# Altium PCB PCB_STM32F0_BUCK_2021-07-07_2021-12-07.pcbdoc
Units mil, origin at the board's own origin, x right, y up, seen from the top; angles counter-clockwise.
Board outline 5374.6 x 4291.85 mil, 2 copper layers (Top Layer, Bottom Layer); 90 components, 52 nets, 323 pads, 491 vias.
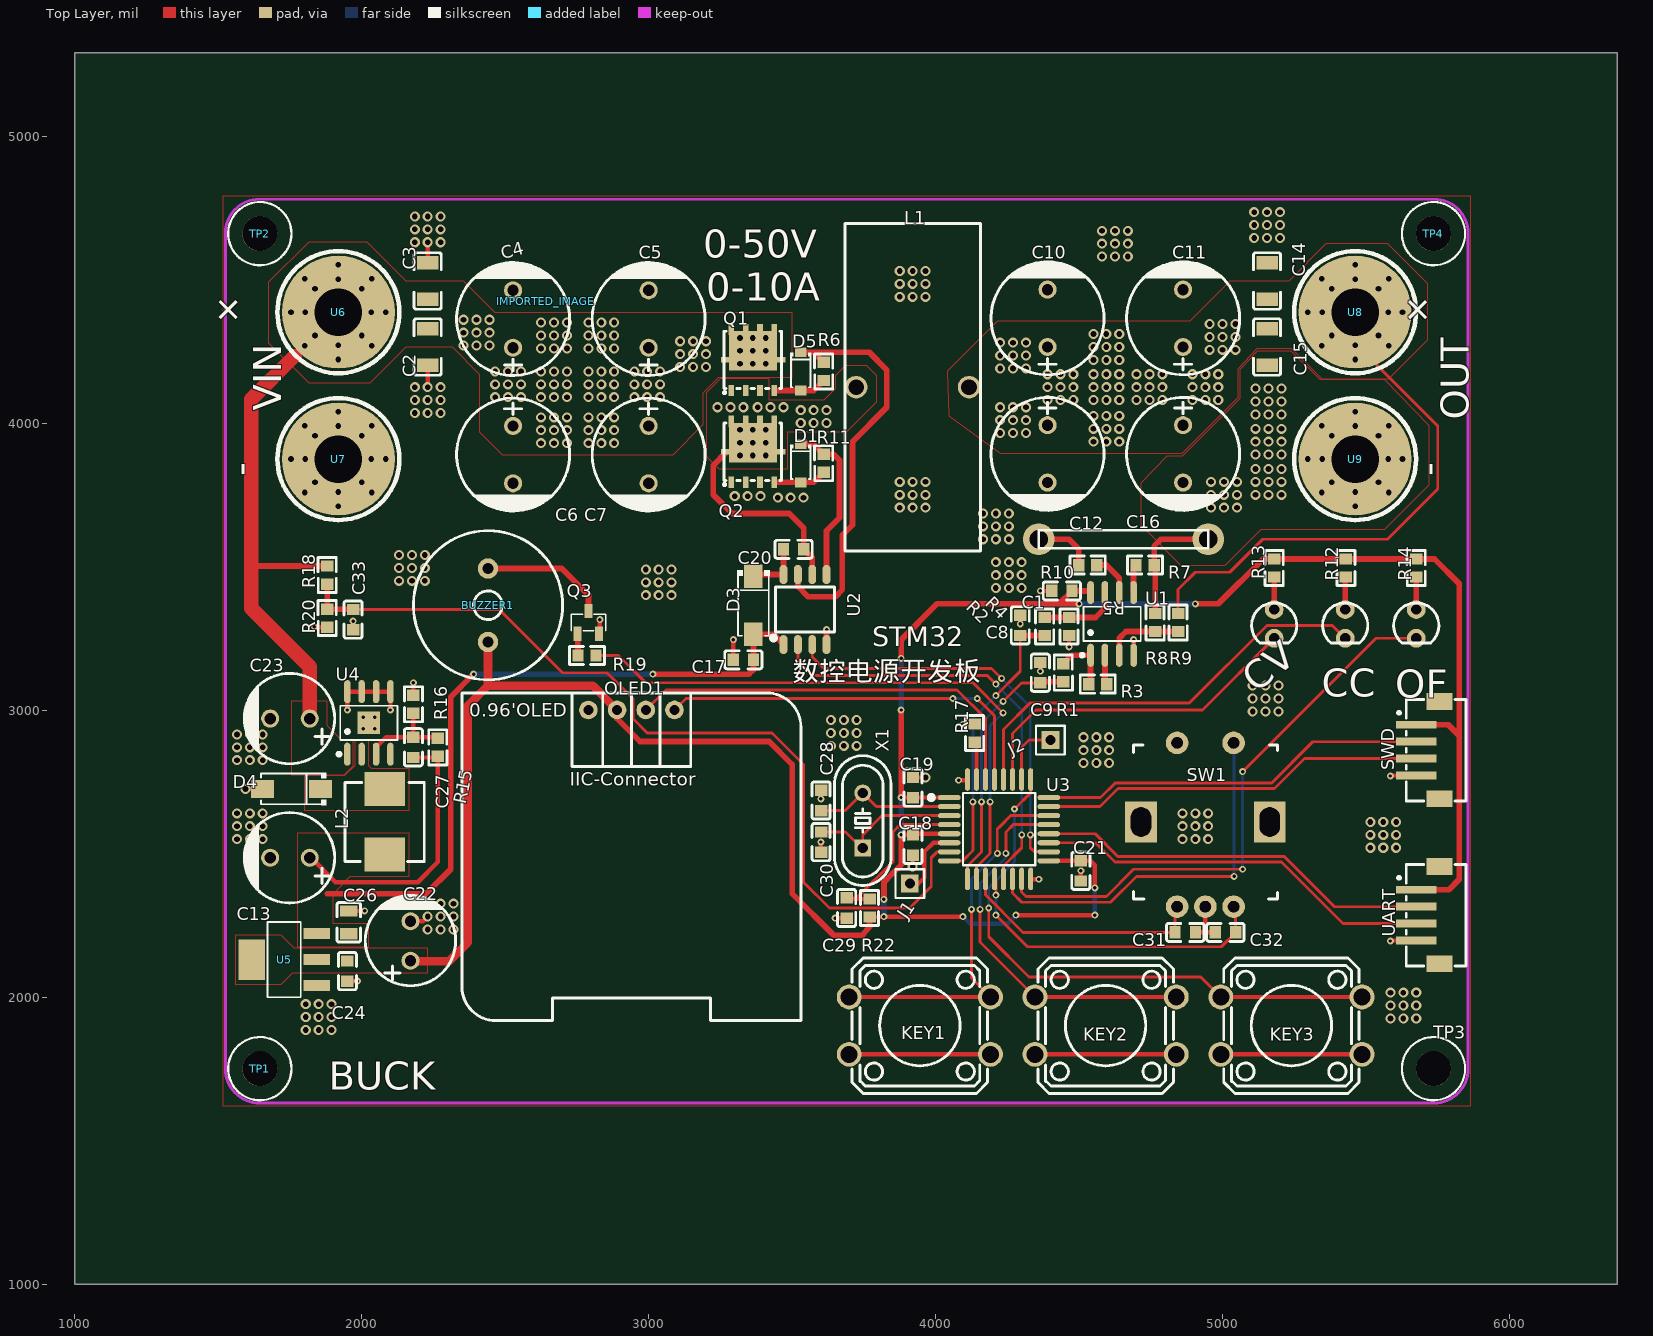
[diagram p0: Top Layer view]
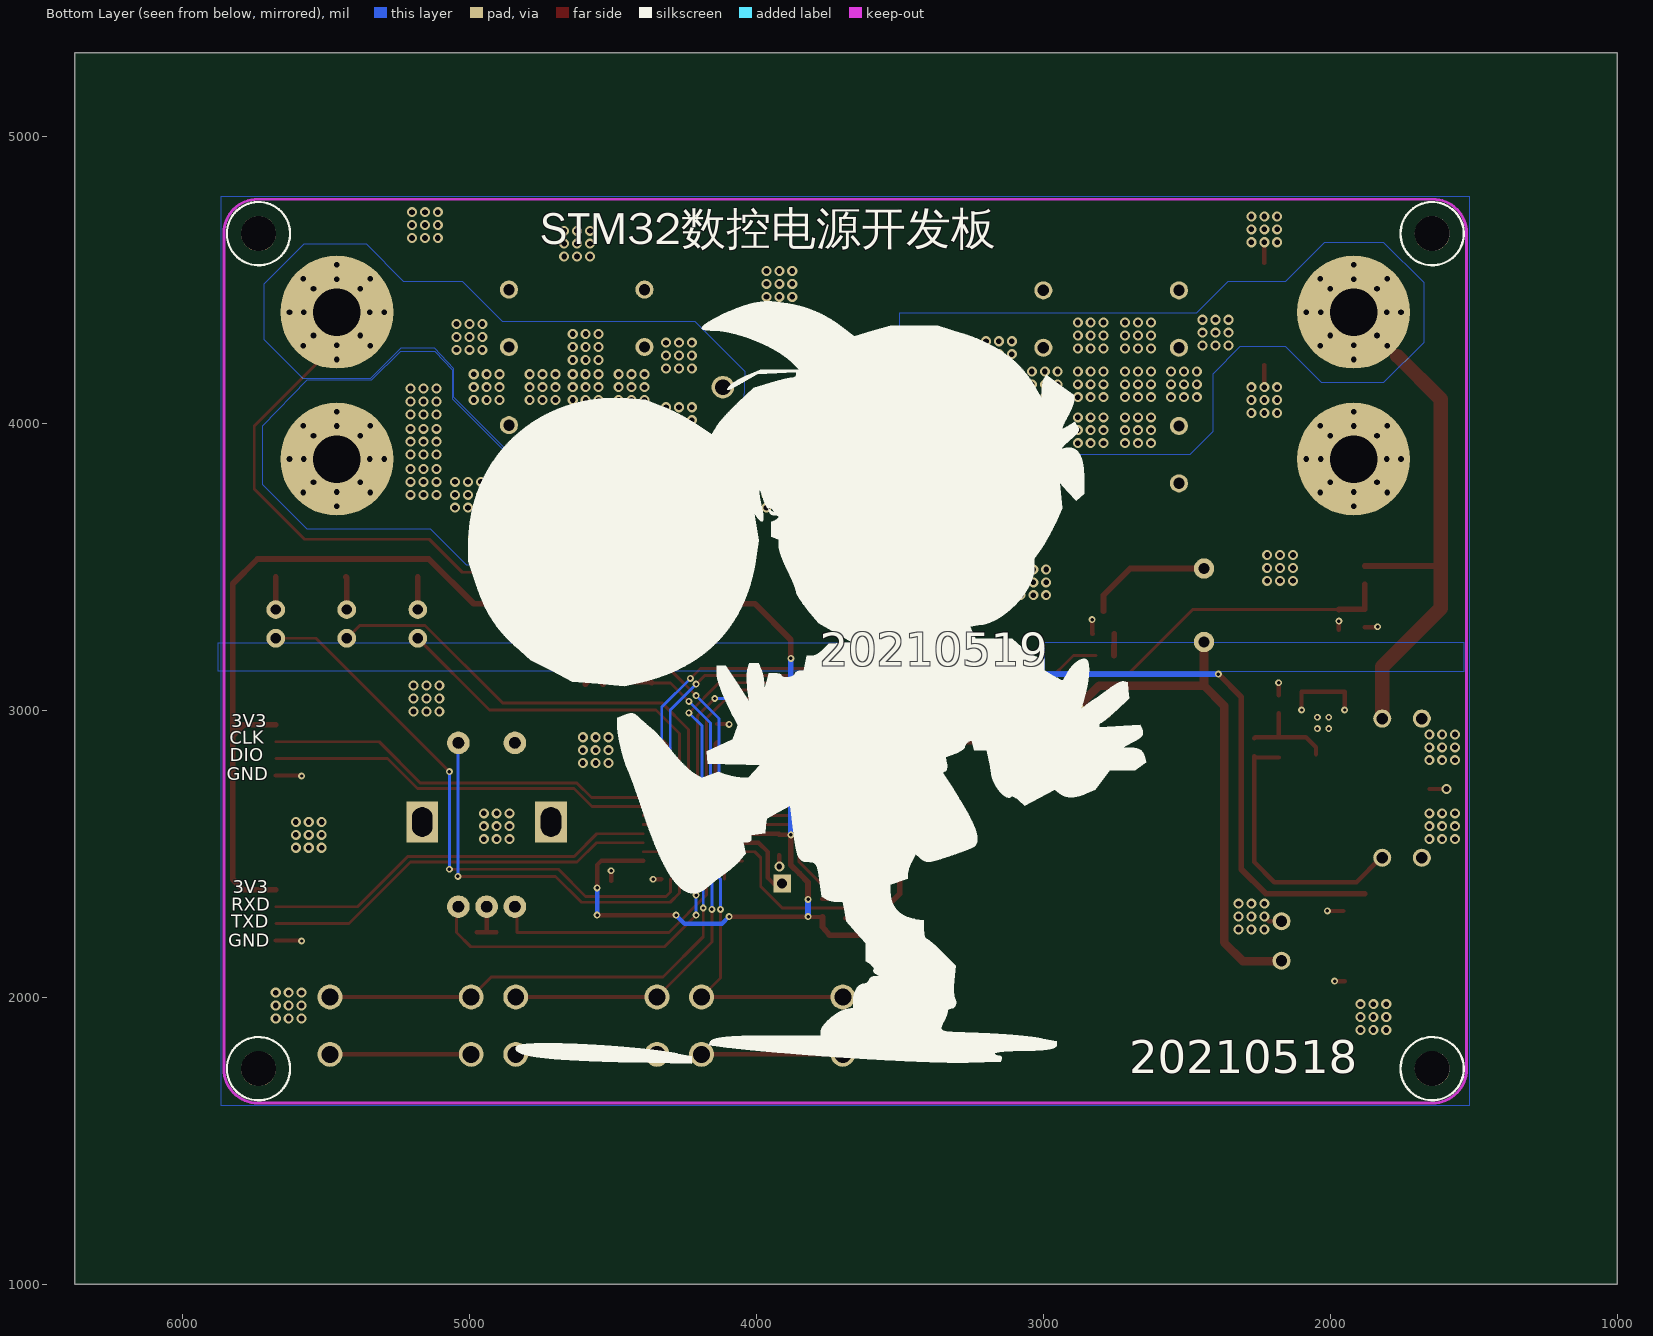
[diagram p1: Bottom Layer view, seen from below]

## Layer stack, top to bottom
Top Layer: signal copper (thickness not stored)
Dielectric: dielectric 12.6, FR-4, Dk 4.8
Bottom Layer: signal copper (thickness not stored)

## Board outline
6374.6,1000 1000,1000 1000,5291.85 6374.6,5291.85

## Components (designator, comment, footprint, x,y, rotation, side; value= is the part's Value field where it differs from the comment)
BUZZER1 "3V" BUZ-TH_BD12.5-P6.50-D0.9 2439.6,3366.85 r270 top
C1 "104" C0603 4439.6,3416.85 r180 top
C2 "104" C1206 2229.6,4266.85 r90 top
C3 "104" C1206 2229.6,4496.85 r270 top
C4 "220uF" CAP-TH_BD10.0-P5.00-D1.0-FD 2527.16,4364.29 r90 top
C5 "220uF" CAP-TH_BD10.0-P5.00-D1.0-FD 2999.6,4364.29 r90 top
C6 "220uF" CAP-TH_BD10.0-P5.00-D1.0-FD 2527.16,3891.85 r270 top
C7 "220uF" CAP-TH_BD10.0-P5.00-D1.0-FD 2999.6,3891.85 r270 top
C8 "103" C0603 4294.6,3296.85 r90 top
C9 "103" C0603 4364.6,3131.85 r270 top
C10 "220uF" CAP-TH_BD10.0-P5.00-D1.0-FD 4389.6,4366.85 r90 top
C11 "220uF" CAP-TH_BD10.0-P5.00-D1.0-FD 4862.04,4366.85 r90 top
C12 "220uF" CAP-TH_BD10.0-P5.00-D1.0-FD 4389.6,3894.41 r270 top
C13 "100uF" CAP-TH_BD8.0-P3.50-D1.0-FD 1749.6,2486.85 r180 top
C14 "104" C1206 5154.6,4496.85 r270 top
C15 "104" C1206 5154.6,4266.85 r90 top
C16 "220uF" CAP-TH_BD10.0-P5.00-D1.0-FD 4862.04,3894.41 r270 top
C17 "104" C0603 3329.6,3176.85 r180 top
C18 "104" C0603 3920.67,2531.44 r270 top
C19 "104" C0603 3920.67,2731.44 r90 top
C20 "104" C0603 3504.6,3561.85 r0 top
C21 "104" C0603 4505.67,2441.44 r90 top
C22 "100uF" CAP-TH_BD8.0-P3.50-D1.0-FD 2169.6,2196.85 r90 top
C23 "100uF" CAP-TH_BD8.0-P3.50-D1.0-FD 1749.6,2971.85 r180 top
C24 "104" C0603 1949.6,2091.85 r90 top
C26 "106" C0805 1954.6,2261.85 r270 top
C27 "333" C0603 2179.6,2871.85 r270 top
C28 "33P" C0603 3600.67,2686.44 r270 top
C29 "104" C0603 3689.6,2311.85 r90 top
C30 "33P" C0603 3600.67,2541.44 r270 top
C31 "104" C0603 4869.6,2226.85 r0 top
C32 "104" C0603 5009.6,2226.85 r180 top
C33 "104" C0603 1969.6,3316.85 r90 top
CC "CC" LED-TH_BD3.0_RED 5427.1,3301.85 r0 top
CV "LED-TH-3mm_G" LED-TH_BD3.0_GREEN 5179.6,3301.85 r0 top
D1 "1N4148W-TP" SOD-123_L2.8-W1.8-LS3.7-RD 3529.6,3861.85 r270 top
D3 "US1M-A" SMA_L4.4-W2.8-LS5.4-RD 3364.6,3366.85 r270 top
D4 "US1M-A" SMA_L4.4-W2.8-LS5.4-RD 1754.6,2726.85 r180 top
D5 "1N4148W-TP" SOD-123_L2.8-W1.8-LS3.7-RD 3529.6,4181.85 r270 top
IMPORTED_IMAGE "IMPORTED_IMAGE" IMPORTED_IMAGE 2640.41,4425.96 r0 top
J1 "1" HDR-M-2.54_1X1 3909.6,2396.85 r0 top
J2 "2" HDR-M-2.54_1X1 4399.6,2896.85 r0 top
KEY1 "K4-12×12_TH" KEY-TH_4P-L12.0-W12.0-P5.00-LS12.5 3944.6,1901.85 r0 top
KEY2 "K4-12×12_TH" KEY-TH_4P-L12.0-W12.0-P5.00-LS12.5 4592.1,1901.85 r0 top
KEY3 "K4-12×12_TH" KEY-TH_4P-L12.0-W12.0-P5.00-LS12.5 5239.6,1901.85 r0 top
L1 "33uH" IND-TH_L29.0-W12.0-P10.00 3919.6,4126.85 r0 top
L2 "100uH" IND-SMD_L7.1-W7.0 2079.6,2611.85 r90 top
OF "OUT" LED-TH_BD3.0_BLUE 5674.6,3301.85 r0 top
OLED1 "0.96OLED_4P" 0.96OLED_4P 2939.6,3001.85 r0 top
Q1 "TPH4R008NH,L1Q" POWERVDFN-8_L5.0-W5.0-P1.27-LS6.0-BL 3364.6,4221.85 r0 top
Q2 "TPH4R008NH,L1Q" POWERVDFN-8_L5.0-W5.0-P1.27-LS6.0-BL 3364.6,3901.85 r0 top
Q3 "SS8050" SOT-23-3_L2.9-W1.3-P1.90-LS2.4-BR 2789.6,3306.85 r270 top
R1 "1K" R0603 4444.6,3131.85 r90 top
R2 "1K" R0603 4379.6,3292.94 r270 top
R3 "1K" R0603 4564.6,3091.85 r0 top
R4 "15K" R0603 4464.6,3292.94 r270 top
R5 "1K" R0603 4529.6,3506.85 r180 top
R6 "100R" R0603 3609.6,4181.85 r270 top
R7 "1K" R0603 4729.6,3506.65 r0 top
R8 "1K" R0603 4764.6,3306.85 r270 top
R9 "20K" R0603 4844.6,3306.85 r270 top
R10 "康铜丝1.5*15-10MR" 康铜丝1.5*15-10MR 4949.6,3596.85 r180 top
R11 "100R" R0603 3609.6,3861.85 r270 top
R12 "10K" R0603 5429.6,3496.85 r90 top
R13 "10K" R0603 5179.6,3496.85 r90 top
R14 "10K" R0603 5674.6,3496.85 r90 top
R15 "30K" R0603 2264.6,2871.85 r270 top
R16 "4.7K" R0603 2179.6,3021.85 r270 top
R17 "10K" R0603 4135.67,2921.44 r90 top
R18 "51K" R0603 1879.6,3471.85 r90 top
R19 "10K" R0603 2784.6,3191.85 r180 top
R20 "10K" R0603 1879.6,3321.85 r90 top
R22 "10K" R0603 3769.6,2311.85 r90 top
SW1 "PEC11R-4220F-S0012" SW-TH_PEC11R-4220F-S0012 4939.6,2601.85 r0 top
SWD "SWD" CONN-SMD_1.5-4P-LT 5714.6,2861.85 r90 top
TP1 "M3铜柱" M3铜柱 1644.6,1751.85 r0 top
TP2 "M3铜柱" M3铜柱 1644.6,4661.85 r0 top
TP3 "M3铜柱" M3铜柱 5734.6,1751.85 r0 top
TP4 "M3铜柱" M3铜柱 5734.6,4661.85 r0 top
U1 "LMC6482AIMX" SOIC-8_L4.9-W3.9-P1.27-LS6.0-BL 4614.6,3301.85 r0 top
U2 "EG3013" SOP-8_L5.0-W4.0-P1.27-LS6.2-BL 3544.6,3351.85 r0 top
U3 "STM32F030K6T6" TQFP-32_L7.0-W7.0-P0.50-BL 4220.67,2586.44 r270 top
U4 "XL7005A" SOIC-8_L5.0-W4.0-P1.27-LS6.0-BL-EP 2024.6,2956.85 r0 top
U5 "AMS1117-3.3" SOT-223-3_L6.5-W3.4-P2.30-LS7.0-BR 1729.6,2131.85 r0 top
U6 "接线端子" 4MM端子 1918.3,4388.15 r0 top
U7 "接线端子" 4MM端子 1918.3,3876.34 r0 top
U8 "接线端子" 4MM端子 5461.61,4388.15 r0 top
U9 "接线端子" 4MM端子 5461.61,3876.34 r0 top
UART "UART" CONN-SMD_1.5-4P-LT 5714.6,2286.85 r90 top
X1 "DIP" HC-49US_L11.5-W4.5-P4.88 3745.67,2616.44 r90 top

## Footprints (in the part's own frame and the unit in brackets; to place one, negate y for a bottom-side part, rotate by r counter-clockwise, add the part's x,y. Pads: shape width x height; smd on the part's side, far side on the other; paste and mask are expansions set on the pad)
0.96OLED_4P [mm]
  round 1.65 hole 0.89: 1(-3.81,-0.001) 2(-1.27,0.002) 3(1.27,0.002) 4(3.81,0.002)
  silkscreen extent -15,-27.5 15,1.5
4MM端子 [mm]
  round 10 hole 4.2: 1(0,0)
  round 1 hole 0.5: 2(-4.191,0) 2(-2.963,-2.963) 2(-2.963,2.963) 2(-2.921,0) 2(-2.065,-2.065) 2(-2.065,2.065) 2(0,-4.191) 2(0,-2.921) 2(0,2.921) 2(0,4.191) 2(2.065,-2.065) 2(2.065,2.065) 2(2.921,0) 2(2.963,-2.963) 2(2.963,2.963) 2(4.191,0)
  silkscreen extent -5.4,-5.4 5.4,5.4
BUZ-TH_BD12.5-P6.50-D0.9 [mm]
  round 1.8 hole 1: 1(-3.25,0) 2(3.25,0)
  silkscreen extent -6.6,-6.6 6.6,6.6
C0603 [mm]
  rect 1x1.1 smd: 1(-0.9,0) 2(0.9,0)
  silkscreen extent -1.65,-0.8 1.65,0.8
C0805 [mm]
  rect 1x1.55 smd: 1(-1,0) 2(1,0)
  silkscreen extent -1.75,-1.04 1.75,1.04
C1206 [mm]
  rect 1.2x1.9 smd: 1(-1.6,0) 2(1.6,0)
  silkscreen extent -2.5,-1.2 2.5,1.2
CAP-TH_BD8.0-P3.50-D1.0-FD [mm]
  round 1.6 hole 1: 1(-1.75,0) 2(1.75,0)
  silkscreen extent -3.96,-4 4.04,4
CAP-TH_BD10.0-P5.00-D1.0-FD [mm]
  round 1.6 hole 1: 1(-2.54,0) 2(2.54,0)
  silkscreen extent -5,-5 5.08,4.99
CONN-SMD_1.5-4P-LT [mm]
  rect 0.7x3.6 smd: 1(2.25,1.025) 2(0.75,1.025) 3(-0.75,1.025) 4(-2.25,1.025)
  rect 1.5x2.3 smd: 5(-4.3,-1.025) 6(4.3,-1.025)
  silkscreen extent -4.5,-3.39 4.5,2.67
HC-49US_L11.5-W4.5-P4.88 [mm]
  rect 1.5x1.5 hole 0.9: 1(-2.44,0)
  round 1.5 hole 0.9: 2(2.44,0)
  silkscreen extent -5.75,-2.5 5.74,2.5
HDR-M-2.54_1X1 [mil]
  rect 62x62 hole 35: 1(0,0)
  silkscreen extent -50,-50 50,50
IMPORTED_IMAGE [mil]
IND-SMD_L7.1-W7.0 [mm]
  rect 3x3.6 smd: 1(-2.9,0) 2(2.9,0)
  silkscreen extent -3.5,-3.5 3.5,3.5
IND-TH_L29.0-W12.0-P10.00 [mm]
  round 2 hole 1.4: 1(-5,0) 2(5,0)
  silkscreen extent -6,-14.5 6,14.5
KEY-TH_4P-L12.0-W12.0-P5.00-LS12.5 [mm]
  round 2.2 hole 1.5: 1(-6.251,2.54) 2(6.251,2.54) 3(-6.251,-2.54) 4(6.251,-2.54)
  silkscreen extent -5.99,-6 5.99,6
LED-TH_BD3.0_BLUE [mil]
  round 65 hole 35.43: 1(0,50) 2(0,-50)
  silkscreen extent -79,-66 79,73
LED-TH_BD3.0_GREEN [mil]
  round 65 hole 35.43: 1(0,50) 2(0,-50)
  silkscreen extent -79,-66 79,73
LED-TH_BD3.0_RED [mil]
  round 65 hole 35.43: 1(0,50) 2(0,-50)
  silkscreen extent -79,-66 79,73
M3铜柱 [mm]
  round 3.1 hole 3.1 unplated: ""(0,0)
  Top Layer pour cut-out: -0.009,-2.933 1.452,-2.541 2.522,-1.471 2.913,-0.009 2.521,1.452 1.451,2.521 -0.01,2.913 -1.471,2.521 -2.541,1.452 -2.933,-0.009 -2.542,-1.471 -1.472,-2.541 -0.011,-2.933 -0.011,-2.933 -0.011,-2.933 -0.009,-2.933
  Bottom Layer pour cut-out: -0.009,-2.913 1.452,-2.521 2.522,-1.451 2.913,0.011 2.521,1.472 1.451,2.541 -0.01,2.933 -1.471,2.541 -2.541,1.472 -2.933,0.011 -2.542,-1.451 -1.472,-2.521 -0.011,-2.913 -0.011,-2.913 -0.011,-2.913 -0.009,-2.913
  silkscreen extent -2.8,-2.8 2.8,2.8
POWERVDFN-8_L5.0-W5.0-P1.27-LS6.0-BL [mm]
  rect 0.5x1 smd: 1(-1.955,-2.7) 2(-0.685,-2.7) 3(0.585,-2.7) 4(1.855,-2.7) 5(1.855,2.7) 6(0.585,2.7) 7(-0.685,2.7) 8(-1.955,2.7)
  rect 1x0.5 smd: 8(-2.35,0) 8(2.35,0)
  rect 4.25x3.5 smd: 8(-0.05,0.8)
  silkscreen extent -2.65,-3 2.49,2.54
R0603 [mm]
  rect 1x1.1 smd: 1(-0.8,0) 2(0.8,0)
  silkscreen extent -1.55,-0.8 1.55,0.81
SMA_L4.4-W2.8-LS5.4-RD [mm]
  rect 2.046x1.62 smd: 1(-2.566,0) 2(2.565,0)
  silkscreen extent -3.08,-1.44 2.7,1.44
SOD-123_L2.8-W1.8-LS3.7-RD [mm]
  rect 0.88x0.99 smd: 1(-1.693,0) 2(1.693,0)
  silkscreen extent -1.63,-0.94 1.41,0.94
SOIC-8_L4.9-W3.9-P1.27-LS6.0-BL [mm]
  oval 0.588x2.045 smd: 1(-1.905,-2.773) 2(-0.635,-2.773) 3(0.635,-2.773) 4(1.905,-2.773) 5(1.905,2.773) 6(0.635,2.773) 7(-0.635,2.773) 8(-1.905,2.773)
  silkscreen extent -2.8,-2.92 2.53,1.52
SOIC-8_L5.0-W4.0-P1.27-LS6.0-BL-EP [mm]
  oval 0.574x2.038 smd: 1(-1.905,-2.769) 2(-0.635,-2.769) 3(0.635,-2.769) 4(1.905,-2.769) 5(1.905,2.769) 6(0.635,2.769) 7(-0.635,2.769) 8(-1.905,2.769)
  rect 2x2 smd: 9(0,0)
  silkscreen extent -2.79,-2.92 2.53,1.52
SOP-8_L5.0-W4.0-P1.27-LS6.2-BL [mm]
  oval 0.7x1.7 smd: 1(-1.905,-3.1) 2(-0.635,-3.1) 3(0.635,-3.1) 4(1.905,-3.1) 5(1.905,3.1) 6(0.635,3.1) 7(-0.635,3.1) 8(-1.905,3.1)
  silkscreen extent -2.99,-2.71 2.6,2
SOT-23-3_L2.9-W1.3-P1.90-LS2.4-BR [mm]
  rect 1.25x0.7 smd: 1(1,-0.95) 2(1,0.95) 3(-1,0)
  silkscreen extent -0.73,-1.53 0.73,1.53
SOT-223-3_L6.5-W3.4-P2.30-LS7.0-BR [mm]
  rect 2.34x0.98 smd: 1(2.87,-2.3) 2(2.87,0) 3(2.87,2.3)
  rect 2.34x3.6 smd: 4(-2.87,0)
  silkscreen extent -1.47,-3.33 1.47,3.33
SW-TH_PEC11R-4220F-S0012 [mm]
  round 2 hole 1 slot 1.005 at 0 deg: 1(-2.499,7.25) 2(2.499,7.25) A(-2.499,-7.25) B(2.499,-7.25) C(0,-7.25)
  rect 2.8x3.6 hole 1.8 slot 2.6 at 90 deg: 3(-5.7,0.249) 3(5.7,0.249)
  silkscreen extent -6.38,-6.57 6.38,7.08
TQFP-32_L7.0-W7.0-P0.50-BL [mm]
  oval 0.45x2 smd: 1(-2.8,-4.4) 2(-2,-4.4) 3(-1.2,-4.4) 4(-0.4,-4.4) 5(0.4,-4.4) 6(1.2,-4.4) 7(2,-4.4) 8(2.8,-4.4) 17(2.8,4.4) 18(2,4.4) 19(1.2,4.4) 20(0.4,4.4) 21(-0.4,4.4) 22(-1.2,4.4) 23(-2,4.4) 24(-2.8,4.4)
  oval 2x0.45 smd: 9(4.4,-2.8) 10(4.4,-2) 11(4.4,-1.2) 12(4.4,-0.4) 13(4.4,0.4) 14(4.4,1.2) 15(4.4,2) 16(4.4,2.8) 25(-4.4,2.8) 26(-4.4,2) 27(-4.4,1.2) 28(-4.4,0.4) 29(-4.4,-0.4) 30(-4.4,-1.2) 31(-4.4,-2) 32(-4.4,-2.8)
  silkscreen extent -3.2,-6.2 3.2,3.2
康铜丝1.5*15-10MR [mm]
  round 2.8 hole 1.6: 1(0,0) 2(15,0)
  silkscreen extent 0,-0.8 15,0.8

## Via types
v1: diameter 35, hole 20, Top Layer to Bottom Layer, 426 vias
v2: diameter 24, hole 12, Top Layer to Bottom Layer, 65 vias

## Nets (pads, with @x,y where several pads share a name; then routed paths per layer and width w, separated by ;. In a path a pad name is that pad's centre, name@x,y a point inside that pad or via, vN(x,y) a via of type N, cw(c..) or ccw(c..) an arc to the next point about the centre after c; other vN are vias at no path point)
3V3: BUZZER1.2 C1.1 C18.1 C19.1 C21.2 C22.1 C24.2 OLED1.2 R12.2 R13.2 R14.2 R22.1 SWD.1 U1.8 U3.1 U3.5 U3.17 U5.2 U5.4 UART.1 | length 9413.8
  Top Layer w15: R22.1 3818.11,2280.36 v2(3819.6,2281.85) v2(4094.6,2281.85) ; v2(3879.6,2566.87) C18.1 3920.67,2570.69 U3.5 ; v2(3879.6,2696.85) C19.1 ; C19.1 3921.34,2696.68 U3.1 ; v2(4279.6,2286.85) v2(4554.6,2286.85) ; U3.17 4504.99,2476.2 C21.2 4539.57,2476.88 4554.6,2461.85 v2(4554.6,2381.85)
  Top Layer w20: OLED1.2@2889.6,3001.85 2889.6,2971.85 2969.6,2891.85 3419.6,2891.85 3499.6,2811.85 3499.6,2361.85 3644.6,2216.85 3744.6,2216.85 3769.6,2246.85 R22.1 ; v2(3819.6,2341.85) 3819.6,2401.85 3849.6,2431.85 3879.6,2461.85 v2(3879.6,2566.87) ; v2(3879.6,2696.85) v2(3879.6,3001.85) ; v2(3879.6,3181.85) 3879.6,3246.85 4004.6,3371.85 4430.03,3371.85 ; v2(4499.6,3371.85) 4430.03,3371.85 ; U1.8 4533.75,3416.85 C1.1 4430.03,3371.85 ; v2(4904.6,3371.85) 4984.6,3371.85 5141.1,3528.35 5179.6,3528.35 5674.6,3528.35 5738.1,3528.35 5824.6,3441.85 5824.6,2890.61 ; UART.1 5788.18,2375.43 5824.6,2411.85 5824.6,2911.85 5786.02,2950.43 SWD.1
  Top Layer w30: C22.1 2170.7,2126.85 2304.6,2126.85 2369.6,2191.85 2369.6,3016.85 2439.6,3086.85 ; BUZZER1.2@2439.6,3238.85 2439.6,3086.85 ; OLED1.2 2804.65,3086.85 2439.6,3086.85
  Bottom Layer w15: v2(4094.6,2281.85) 4119.6,2256.85 4249.6,2256.85 v2(4279.6,2286.85) ; v2(4554.6,2286.85) v2(4554.6,2381.85)
  Bottom Layer w20: v2(3819.6,2281.85) v2(3819.6,2341.85) ; v2(3879.6,2566.87) v2(3879.6,2696.85) ; v2(3879.6,3001.85) v2(3879.6,3181.85) ; v2(4499.6,3371.85) v2(4904.6,3371.85)
12V: C13.1 C17.1 C26.2 C27.2 D3.2 L2.1 R15.2 U2.1 U5.3 | length 3364.1
  Top Layer w15: C13.1@1823.5,2486.85 1908.5,2401.85 2194.6,2401.85 2264.6,2471.85 R15.2 2260.66,2836.41 C27.2
  Top Layer w20: 1879.6,2361.85 2224.6,2361.85 2309.6,2446.85 2309.6,3046.85 v2(2389.6,3126.85) ; v2(3014.6,3126.85) 3029.6,3126.85 3349.6,3126.85 3365.03,3142.28 C17.1 D3.2 3433.56,3265.85 U2.1
  Bottom Layer w20: v2(2389.6,3126.85) v2(3014.6,3126.85)
A: C31.1 SW1.A U3.11 | length 862.7
  Top Layer w10: U3.11 4173.43,2358.02 4304.6,2226.85 C31.1 4834.17,2309.37 SW1.A
ADC-I: C8.1 R2.2 U3.8 | length 999.8
  Top Layer w10: U3.8 4093.95,2476.2 4129.6,2511.85 v2(4129.6,2681.85) ; v2(4209.6,3051.85) 4294.6,3136.85 C8.1
  Top Layer w20: C8.1 R2.2
  Bottom Layer w10: v2(4129.6,2681.85) 4129.6,2971.85 v2(4209.6,3051.85)
ADC-V: C9.2 R1.1 U3.9 | length 908.4
  Top Layer w10: U3.9 4110.4,2457.65 4159.6,2506.85 v2(4159.6,2681.85) ; v2(4234.6,3031.85) 4299.16,3096.41 C9.2
  Top Layer w20: C9.2 4368.55,3100.36 R1.1
  Bottom Layer w10: v2(4159.6,2681.85) 4159.6,2956.85 v2(4234.6,3031.85)
B: C32.1 SW1.B U3.12 | length 1122.5
  Top Layer w10: U3.12 4209.6,2408.55 v2(4209.6,2356.85) ; v2(4209.6,2286.85) 4319.6,2176.85 4599.6,2176.85 4995.03,2176.85 C32.1 5045.03,2309.37 SW1.B
  Bottom Layer w10: v2(4209.6,2286.85) v2(4209.6,2356.85)
BUZZER1_1: BUZZER1.1 Q3.3 | length 444.1
  Top Layer w20: BUZZER1.1 2696.65,3494.8 2789.6,3401.85 Q3.3
CC: CC.2 U3.28 | length 1533.8
  Top Layer w10: U3.28@4236.4,2759.65 4236.4,2933.65 4329.6,3026.85 4884.6,3026.85 5154.6,3296.85 5382.1,3296.85 CC.2
CC_1: CC.1 R12.1 | length 114.5
  Top Layer w20: CC.1 5427.1,3462.86 R12.1
CS: C15.1 C16.2 R7.2 R8.1 R10.1 U9.1 | length 434.7
  Top Layer w20: R8.1 4764.6,3503.15 R7.2 4761.1,3573.35 4784.6,3596.85 R10.1@4949.6,3596.85
  other v1: 4959.6,3706.85 5004.6,3706.85 5049.6,3706.85 4959.6,3751.85 5004.6,3751.85 5049.6,3751.85 5114.6,3751.85 5159.6,3751.85 5204.6,3751.85 4959.6,3796.85 5004.6,3796.85 5049.6,3796.85 5114.6,3796.85 5159.6,3796.85 5204.6,3796.85 5114.6,3841.85 5159.6,3841.85 5204.6,3841.85 5114.6,3891.85 5159.6,3891.85 5204.6,3891.85 5114.6,3936.85 5159.6,3936.85 5204.6,3936.85 5114.6,3981.85 5159.6,3981.85 5204.6,3981.85 5114.6,4031.85 5159.6,4031.85 5204.6,4031.85 5114.6,4076.85 5159.6,4076.85 5204.6,4076.85 5114.6,4121.85 5159.6,4121.85 5204.6,4121.85
CV: CV.2 U3.27 | length 1209.6
  Top Layer w10: U3.27@4267.9,2759.65 4267.9,2920.15 4349.6,3001.85 4929.6,3001.85 CV.2
CV_1: CV.1 R13.1 | length 113.5
  Top Layer w20: CV.1 R13.1
D: SW1.2 U3.14 | length 1337.9
  Top Layer w10: U3.14 4267.91,2363.54 4299.6,2331.85 4609.6,2331.85 4699.6,2421.85 v2(5039.6,2421.85)
  Bottom Layer w10: SW1.2 5039.6,2885.7 v2(5039.6,2421.85)
GND: C1.2 C2.1 C3.1 C4.2 C5.2 C6.2 C7.2 C8.2 C9.1 C10.2 C11.2 C12.2 C13.2 C14.1 C17.2 C18.2 C19.2 C21.1 C22.2 C23.2 C24.1 C26.1 C28.1 C29.1 C30.2 C31.2 C32.2 C33.1 D4.2 KEY1.3 KEY1.4 KEY2.3 KEY2.4 KEY3.3 KEY3.4 OLED1.1 Q2.1 Q2.2 Q2.3 Q3.2 R4.2 R5.2 R10.2 R16.1 R17.2 R20.1 SW1.1 SW1.3 SW1.C SWD.4 SWD.5 SWD.6 U1.4 U2.4 U3.16 U3.32 U4.5 U4.6 U4.7 U4.8 U4.9 U5.1 U7.1 UART.4 UART.5 UART.6 | length 4512.6
  Top Layer w10: KEY2.3 KEY2.4 ; KEY3.3 KEY3.4
  Top Layer w15: v1(1594.6,2726.85) D4.2 ; v2(1834.6,3291.85) 1834.6,3290.36 R20.1 ; C24.1 1984.6,2056.42 v2(1984.6,2056.85) ; v2(1949.6,3001.85) U4.8 U4.5 v2(2099.6,3001.85) ; C26.1 2009.6,2301.22 v2(2009.6,2301.85) ; C33.1 v2(1969.6,3311.85) ; C22.2 2213.5,2265.75 v1(2229.6,2281.85) ; R16.1 v2(2179.6,3096.85) ; v1(2229.6,4126.85) C2.1 ; C3.1 v1(2229.6,4631.85) ; Q3.2 2829.6,3267.48 v2(2829.6,3316.85) ; C17.2 3294.6,3176.85 v2(3294.6,3246.85) ; v2(3599.6,2541.85) 3599.6,2506 C30.2 ; v2(3599.6,2691.85) 3599.6,2721.87 C28.1 ; v2(3649.6,2276.85) 3649.6,2276.42 C29.1 ; KEY1.3@3663.5,1796.85 3668.5,1801.85 KEY1.4 ; v1(3919.6,2456.85) 3919.6,2496 C18.2 ; C19.2 v1@3964.6,2766.88 ; v2(4079.6,2756.85) 4107.61,2756.85 U3.32 ; v2(4094.6,2951.85) 4094.6,2952.94 R17.2 ; v2(4294.6,3301.85) C8.2 ; U3.16 4332.27,2411.85 v2(4359.6,2411.85) ; KEY2.3 KEY2.4 ; v2(4364.6,3136.85) C9.1 ; v2(4364.6,3416.85) C1.2 ; v2(4464.6,3221.85) R4.2 ; C21.1 v2(4505.67,2441.44) ; U1.4 v2(4689.6,3246.85) ; C31.2 C32.2 ; 4939.6,2226.85 SW1.C ; KEY3.3 KEY3.4 ; v2(5584.6,2196.85) 5584.6,2198.27 UART.4 ; v2(5584.6,2771.85) 5584.6,2773.27 SWD.4
  Top Layer w20: U2.4 v2(3619.6,3281.85) ; R10.2@4359.05,3596.85 4464.6,3596.85 4498.1,3563.35 R5.2
  other v1: 1804.6,1886.85 1849.6,1886.85 1894.6,1886.85 5584.6,1926.85 5629.6,1926.85 5674.6,1926.85 1804.6,1931.85 1849.6,1931.85 1894.6,1931.85 5584.6,1971.85 5629.6,1971.85 5674.6,1971.85 1804.6,1976.85 1849.6,1976.85 1894.6,1976.85 5584.6,2016.85 5629.6,2016.85 5674.6,2016.85 2229.6,2236.85 2274.6,2236.85 2319.6,2236.85 2274.6,2281.85 2319.6,2281.85 2229.6,2326.85 2274.6,2326.85 2319.6,2326.85 5514.6,2521.85 5559.6,2521.85 5604.6,2521.85 1564.6,2551.85 1609.6,2551.85 1654.6,2551.85 4859.6,2551.85 4904.6,2551.85 4949.6,2551.85 5514.6,2566.85 5559.6,2566.85 5604.6,2566.85 1564.6,2596.85 1609.6,2596.85 1654.6,2596.85 4859.6,2596.85 4904.6,2596.85 4949.6,2596.85 5514.6,2611.85 5559.6,2611.85 5604.6,2611.85 1564.6,2641.85 1609.6,2641.85 1654.6,2641.85 4859.6,2641.85 4904.6,2641.85 4949.6,2641.85 3964.6,2766.85 4514.6,2816.85 4559.6,2816.85 4604.6,2816.85 1564.6,2826.85 1609.6,2826.85 1654.6,2826.85 4514.6,2861.85 4559.6,2861.85 4604.6,2861.85 1564.6,2871.85 1609.6,2871.85 1654.6,2871.85 3634.6,2876.85 3679.6,2876.85 3724.6,2876.85 4514.6,2906.85 4559.6,2906.85 4604.6,2906.85 1564.6,2916.85 1609.6,2916.85 1654.6,2916.85 3634.6,2921.85 3679.6,2921.85 3724.6,2921.85 3634.6,2966.85 3679.6,2966.85 3724.6,2966.85 5104.6,2996.85 5149.6,2996.85 5194.6,2996.85 5104.6,3041.85 5149.6,3041.85 5194.6,3041.85 5104.6,3086.85 5149.6,3086.85 5194.6,3086.85 2989.6,3401.85 3034.6,3401.85 3079.6,3401.85 4209.6,3426.85 4254.6,3426.85 4299.6,3426.85 2989.6,3446.85 3034.6,3446.85 3079.6,3446.85 2129.6,3451.85 2174.6,3451.85 2219.6,3451.85 4209.6,3471.85 4254.6,3471.85 4299.6,3471.85 2989.6,3491.85 3034.6,3491.85 3079.6,3491.85 2129.6,3496.85 2174.6,3496.85 2219.6,3496.85 4209.6,3516.85 4254.6,3516.85 4299.6,3516.85 2129.6,3541.85 2174.6,3541.85 2219.6,3541.85 4164.6,3596.85 4209.6,3596.85 4254.6,3596.85 4164.6,3641.85 4209.6,3641.85 4254.6,3641.85 4164.6,3686.85 4209.6,3686.85 4254.6,3686.85 3874.6,3706.85 3919.6,3706.85 3964.6,3706.85 3449.6,3741.85 3494.6,3741.85 3539.6,3741.85 3299.6,3746.85 3344.6,3746.85 3389.6,3746.85 3874.6,3751.85 3919.6,3751.85 3964.6,3751.85 3874.6,3796.85 3919.6,3796.85 3964.6,3796.85 2184.6,4036.85 2229.6,4036.85 2274.6,4036.85 2184.6,4081.85 2229.6,4081.85 2274.6,4081.85 2184.6,4126.85 2274.6,4126.85 3874.6,4441.85 3919.6,4441.85 3964.6,4441.85 3874.6,4486.85 3919.6,4486.85 3964.6,4486.85 3874.6,4531.85 3919.6,4531.85 3964.6,4531.85 4579.6,4581.85 4624.6,4581.85 4669.6,4581.85 4579.6,4626.85 4624.6,4626.85 4669.6,4626.85 2184.6,4631.85 2274.6,4631.85 5109.6,4646.85 5154.6,4646.85 5199.6,4646.85 4579.6,4671.85 4624.6,4671.85 4669.6,4671.85 2184.6,4676.85 2229.6,4676.85 2274.6,4676.85 5109.6,4691.85 5154.6,4691.85 5199.6,4691.85 2184.6,4721.85 2229.6,4721.85 2274.6,4721.85 5109.6,4736.85 5154.6,4736.85 5199.6,4736.85
  other v2: 2004.92,2937.16 2044.29,2937.16 2004.92,2976.53 2044.29,2976.53
HO: D5.1 R6.1 U2.7 | length 1426.3
  Top Layer w20: U2.7@3519.6,3473.95 3519.6,3431.85 3554.6,3396.85 3649.6,3396.85 3674.6,3421.85 3674.6,3611.85 3709.6,3646.85 3709.6,3936.85 3829.6,4056.85 3829.6,4186.85 3768,4248.45 3574.5,4248.45 ; D5.1 3574.45,4248.48 R6.1
LED-OUT: OF.2 U3.15 | length 1999.7
  Top Layer w10: U3.15 4299.4,2367.05 4314.6,2351.85 4594.6,2351.85 4689.6,2446.85 4804.6,2446.85 v2(5069.6,2446.85) ; v2(5069.6,2786.85) 5534.6,3251.85 OF.2
  Bottom Layer w10: v2(5069.6,2446.85) v2(5069.6,2786.85)
LO: D1.1 R11.1 U2.5 | length 575
  Top Layer w20: D1.1 3574.45,3928.48 R11.1 3643.1,3893.35 3664.6,3871.85 3664.6,3671.85 3619.6,3626.85 U2.5@3619.6,3473.95
NRST: C29.2 R22.2 U3.4 | length 605.7
  Top Layer w10: C29.2 3725.04,2347.29 3850.67,2472.92 3850.67,2576.44 3876.42,2602.19 U3.4
  Top Layer w15: C29.2 3693.54,2343.35 R22.2@3769.6,2343.35
OUT_1: OF.1 R14.1 | length 113.5
  Top Layer w20: OF.1 R14.1
PA2-BELL: R19.1 U3.10 | length 2118.4
  Top Layer w10: R19.1 2894.6,3191.85 2989.6,3096.85 4129.6,3096.85 v2(4234.6,2991.85) ; U3.10 4141.93,2454.18 4164.6,2476.85 4189.6,2501.85 v2(4189.6,2681.85)
  Bottom Layer w10: v2(4189.6,2681.85) 4189.6,2946.85 v2(4234.6,2991.85)
PF0: C28.2 U3.2 X1.2 | length 491.8
  Top Layer w10: C28.2 3684.17,2651 X1.2 3792.99,2665.18 U3.2
PF1: C30.1 U3.3 X1.1 | length 544.1
  Top Layer w10: C30.1 3685.24,2576.87 3741.73,2520.38 X1.1 3745.67,2566.44 3812.91,2633.68 U3.3
PWM1: U2.2 U3.13 | length 1523.2
  Top Layer w10: U2.2 3519.61,3171.84 3569.6,3121.85 4179.6,3121.85 v2(4209.6,3091.85) ; U3.13 4236.42,2458.67 4299.6,2521.85 v2(4299.6,2566.85)
  Bottom Layer w10: v2(4209.6,3091.85) 4299.6,3001.85 v2(4299.6,2566.85)
PWM2: U2.3 U3.18 | length 1435.6
  Top Layer w10: U2.3 3569.61,3186.84 3609.6,3146.85 4194.6,3146.85 v2(4229.6,3111.85) ; v2(4329.6,2566.85) 4329.6,2521.85 4343.75,2507.7 U3.18
  Bottom Layer w10: v2(4229.6,3111.85) 4329.6,3011.85 v2(4329.6,2566.85)
Q1_4: D5.2 Q1.4 R6.2 | length 186.7
  Top Layer w20: Q1.4 3437.96,4115.22 D5.2 3574.47,4115.22 R6.2
Q2_4: D1.2 Q2.4 R11.2 | length 186.5
  Top Layer w20: Q2.4 D1.2 3574.47,3795.22 R11.2
Q3_1: Q3.1 R19.2 | length 75.6
  Top Layer w20: Q3.1@2752.2,3267.45 R19.2
RX: U3.20 UART.2 | length 1385.6
  Top Layer w10: U3.20@4393.9,2570.65 4555.8,2570.65 4634.6,2491.85 5214.6,2491.85 5390.1,2316.35 UART.2
S1: KEY1.1 KEY1.2 U3.22 | length 1377.6
  Top Layer w10: v2(4124.6,2306.85) 4124.6,2067.95 KEY1.2 ; v2(4214.6,2501.85) 4214.6,2586.85 4224.6,2596.85 4261.43,2633.68 U3.22
  Top Layer w15: KEY1.1@3663.5,1996.85 3668.5,2001.85 KEY1.2
  Bottom Layer w10: v2(4124.6,2306.85) 4124.6,2411.85 v2(4214.6,2501.85)
S2: KEY2.1 KEY2.2 U3.21 | length 1835.8
  Top Layer w10: v2(4154.6,2306.85) 4154.6,2193.25 KEY2.1 KEY2.2 ; v2(4244.6,2501.85) 4244.6,2576.85 4269.94,2602.19 U3.21
  Top Layer w15: KEY2.1 KEY2.2
  Bottom Layer w10: v2(4154.6,2306.85) 4154.6,2396.85 4159.6,2401.85 4244.6,2486.85 v2(4244.6,2501.85)
S3: KEY3.1 KEY3.2 U3.25 | length 2488.7
  Top Layer w10: v2(4184.6,2311.85) 4184.6,2211.85 4324.6,2071.85 4923.5,2071.85 KEY3.1 KEY3.2 ; v2(4274.6,2656.85) 4330.91,2713.16 U3.25
  Top Layer w15: KEY3.1 KEY3.2
  Bottom Layer w10: v2(4184.6,2311.85) 4184.6,2381.85 4269.6,2466.85 4274.6,2471.85 v2(4274.6,2656.85)
SCL: OLED1.3 U3.30 | length 1467.1
  Top Layer w10: OLED1.3 3059.55,3071.85 4074.6,3071.85 4173.43,2973.02 U3.30
SDA: OLED1.4 U3.29 | length 1378.7
  Top Layer w10: OLED1.4 3129.55,3041.85 v2(4059.6,3041.85) ; v2(4144.6,3041.85) 4204.92,2981.53 U3.29
  Bottom Layer w10: v2(4059.6,3041.85) v2(4144.6,3041.85)
SW: C20.2 L1.1 Q1.1 Q1.2 Q1.3 Q2.5 Q2.6 Q2.7 Q2.8 U2.6 | length 707.7
  Top Layer w20: Q2.8@3272.08,3901.86 3224.6,3854.38 3224.6,3751.85 3289.6,3686.85 3489.6,3686.85 3540.04,3636.41 C20.2 3569.61,3532.28 U2.6
  other v1: 3317.63,3888.35 3362.63,3888.35 3407.63,3888.35 3317.63,3933.35 3362.63,3933.35 3407.63,3933.35 3317.63,3978.35 3362.63,3978.35 3407.63,3978.35 3529.6,4001.85 3574.6,4001.85 3619.6,4001.85 3529.6,4046.85 3574.6,4046.85 3619.6,4046.85 3239.6,4056.85 3284.6,4056.85 3329.6,4056.85 3379.6,4056.85 3424.6,4056.85 3469.6,4056.85
SWCLK: SWD.2 U3.24 | length 1360.9
  Top Layer w10: U3.24@4393.9,2696.65 4574.6,2696.85 4624.6,2746.85 5169.6,2746.85 5314.1,2891.35 SWD.2
SWDIO: SWD.3 U3.23 | length 1349.6
  Top Layer w10: U3.23 4572.9,2665.15 4635.7,2727.95 5180.7,2727.95 5285.1,2832.35 SWD.3@5674.2,2832.35
TX: U3.19 UART.3 | length 1397.1
  Top Layer w10: U3.19 4557.2,2539.25 4624.6,2471.85 5204.6,2471.85 5419.1,2257.35 UART.3@5674.2,2257.35
U1_1: R1.2 R3.1 U1.1 | length 210.7
  Top Layer w20: R1.2 4473.95,3192.7 U1.1 4539.6,3098.34 R3.1
U1_2: R3.2 U1.2 | length 103.5
  Top Layer w20: U1.2 4589.6,3098.35 R3.2
U1_3: R8.2 R9.2 U1.3 | length 273.9
  Top Layer w20: U1.3 4639.6,3251.85 4663.1,3275.35 R8.2 R9.2
U1_5: R7.1 U1.5 | length 104.4
  Top Layer w20: U1.5 4689.6,3503.34 R7.1@4698.11,3511.85
U1_6: R5.1 U1.6 | length 148
  Top Layer w20: R5.1 4594.6,3506.85 4639.6,3461.85 U1.6
U1_7: R2.1 R4.1 U1.7 | length 277.6
  Top Layer w20: R2.1 R4.1 4557.18,3324.43 4589.6,3356.85 U1.7
U2_8: C20.1 D3.1 U2.8 | length 195.5
  Top Layer w20: D3.1 3370.65,3473.9 U2.8 C20.1
U3_6: J1.1 U3.6 | length 249.5
  Top Layer w15: J1.1 3939.6,2396.85 3959.6,2416.85 3959.6,2506.85 3991.95,2539.2 U3.6
U3_26: J2.1 U3.26 | length 222.6
  Top Layer w10: U3.26 4299.41,2871.66 4324.6,2896.85 J2.1
U3_31: R17.1 U3.31 | length 132.9
  Top Layer w15: R17.1@4135.67,2889.95 4141.93,2883.69 U3.31
U4_2: D4.1 L2.2 U4.2
U4_3: C27.1 R15.1 R16.2 U4.3 | length 338.4
  Top Layer w15: U4.3 2049.6,2871.85 2085.03,2907.28 C27.1 ; R16.2 C27.1 ; R15.1 2260.66,2907.28 C27.1
VB: C33.2 R18.1 R20.2 U3.7 | length 3107.1
  Top Layer w10: C33.2 2479.16,3352.29 2699.6,3131.85 2854.6,3131.85 2944.6,3041.85 2944.6,2971.85 2994.6,2921.85 3429.6,2921.85 3539.6,2811.85 3539.6,2401.85 3629.6,2311.85 3909.6,2311.85 3984.6,2386.85 3984.6,2486.85 4005.45,2507.7 U3.7
  Top Layer w20: R18.1 1879.6,3353.35 1968.54,3353.35 C33.2
VIN: C2.2 C3.2 C4.1 C5.1 C6.1 C7.1 C23.1 Q1.5 Q1.6 Q1.7 Q1.8 R18.2 U4.1 U6.1 | length 1675.7
  Top Layer w20: 1614.6,3503.35 R18.2@1879.6,3503.35
  Top Layer w50: 1765.7,4235.55 1614.6,4084.45 1614.6,3356.85 1818.5,3152.95 C23.1
  other v1: 2624.6,3931.85 2669.6,3931.85 2714.6,3931.85 2789.6,3931.85 2834.6,3931.85 2879.6,3931.85 2624.6,3976.85 2669.6,3976.85 2714.6,3976.85 2789.6,3976.85 2834.6,3976.85 2879.6,3976.85 2624.6,4021.85 2669.6,4021.85 2714.6,4021.85 2789.6,4021.85 2834.6,4021.85 2879.6,4021.85 2464.6,4091.85 2509.6,4091.85 2554.6,4091.85 2624.6,4091.85 2669.6,4091.85 2714.6,4091.85 2789.6,4091.85 2834.6,4091.85 2879.6,4091.85 2949.6,4091.85 2994.6,4091.85 3039.6,4091.85 2464.6,4136.85 2509.6,4136.85 2554.6,4136.85 2624.6,4136.85 2669.6,4136.85 2714.6,4136.85 2789.6,4136.85 2834.6,4136.85 2879.6,4136.85 2949.6,4136.85 2994.6,4136.85 3039.6,4136.85 2464.6,4181.85 2509.6,4181.85 2554.6,4181.85 2624.6,4181.85 2669.6,4181.85 2714.6,4181.85 2789.6,4181.85 2834.6,4181.85 2879.6,4181.85 2949.6,4181.85 2994.6,4181.85 3039.6,4181.85 3109.6,4196.85 3154.6,4196.85 3199.6,4196.85 3317.63,4208.35 3362.63,4208.35 3407.63,4208.35 3109.6,4241.85 3154.6,4241.85 3199.6,4241.85 3317.63,4253.35 3362.63,4253.35 3407.63,4253.35 2624.6,4261.85 2669.6,4261.85 2714.6,4261.85 2789.6,4261.85 2834.6,4261.85 2879.6,4261.85 2354.6,4271.85 2399.6,4271.85 2444.6,4271.85 3109.6,4286.85 3154.6,4286.85 3199.6,4286.85 3317.63,4298.35 3362.63,4298.35 3407.63,4298.35 2624.6,4306.85 2669.6,4306.85 2714.6,4306.85 2789.6,4306.85 2834.6,4306.85 2879.6,4306.85 2354.6,4316.85 2399.6,4316.85 2444.6,4316.85 2624.6,4351.85 2669.6,4351.85 2714.6,4351.85 2789.6,4351.85 2834.6,4351.85 2879.6,4351.85 2354.6,4361.85 2399.6,4361.85 2444.6,4361.85
VOUT: C10.1 C11.1 C12.1 C14.2 C15.2 C16.1 L1.2 R9.1 U8.1 | length 1733.8
  Top Layer w10: R9.1@4844.6,3338.35 4844.6,3421.85 4904.6,3481.85 5024.6,3481.85 5139.6,3596.85 5574.6,3596.85 5749.6,3771.85 5749.6,3991.85 5491.3,4250.15 U8.1@5491.3,4265.15
  other v1: 4549.6,3936.85 4594.6,3936.85 4639.6,3936.85 4224.6,3966.85 4269.6,3966.85 4314.6,3966.85 4549.6,3981.85 4594.6,3981.85 4639.6,3981.85 4224.6,4011.85 4269.6,4011.85 4314.6,4011.85 4549.6,4026.85 4594.6,4026.85 4639.6,4026.85 4224.6,4056.85 4269.6,4056.85 4314.6,4056.85 4389.6,4081.85 4434.6,4081.85 4479.6,4081.85 4549.6,4081.85 4594.6,4081.85 4639.6,4081.85 4699.6,4081.85 4744.6,4081.85 4789.6,4081.85 4894.6,4081.85 4939.6,4081.85 4984.6,4081.85 4389.6,4126.85 4434.6,4126.85 4479.6,4126.85 4549.6,4126.85 4594.6,4126.85 4639.6,4126.85 4699.6,4126.85 4744.6,4126.85 4789.6,4126.85 4894.6,4126.85 4939.6,4126.85 4984.6,4126.85 4389.6,4171.85 4434.6,4171.85 4479.6,4171.85 4549.6,4171.85 4594.6,4171.85 4639.6,4171.85 4699.6,4171.85 4744.6,4171.85 4789.6,4171.85 4894.6,4171.85 4939.6,4171.85 4984.6,4171.85 4224.6,4191.85 4269.6,4191.85 4314.6,4191.85 4549.6,4221.85 4594.6,4221.85 4639.6,4221.85 4224.6,4236.85 4269.6,4236.85 4314.6,4236.85 4954.6,4256.85 4999.6,4256.85 5044.6,4256.85 4549.6,4266.85 4594.6,4266.85 4639.6,4266.85 4224.6,4281.85 4269.6,4281.85 4314.6,4281.85 4954.6,4301.85 4999.6,4301.85 5044.6,4301.85 4549.6,4311.85 4594.6,4311.85 4639.6,4311.85 4954.6,4346.85 4999.6,4346.85 5044.6,4346.85
pads on no net: TP1. TP2. TP3. TP4. U4.4 U6.2 U7.2 U8.2 U9.2

## Polygon pours and split planes (outlines as drawn)
GND on Bottom Layer (solid): 3144.6,3136.85 5874.6,3136.85 5874.6,3236.85 3144.6,3236.85
GND on Bottom Layer (solid): 1532.1,3136.85 1532.1,3236.85 2997.1,3236.85 2997.1,3136.85 1532.1,3136.85
CS on Bottom Layer (solid): 5564.6,4151.85 5339.6,4151.85 5239.6,4251.85 5119.6,4251.85 5059.6,4186.85 5059.6,4086.85 4859.6,3886.85 4804.6,3886.85 4714.6,3791.85 4714.6,3646.85 4854.6,3506.85 5009.6,3506.85 5134.6,3631.85 5504.6,3631.85 5564.6,3631.85 5719.6,3786.85 5719.6,3991.85 5564.6,4151.85
VOUT on Bottom Layer (solid): 4429.6,4356.85 4214.6,4356.85 4039.6,4181.85 4044.6,4026.85 4224.6,3896.85 4859.6,3896.85 5054.6,4091.85 5054.6,4191.85 5119.6,4261.85 5239.6,4261.85 5344.6,4156.85 5579.6,4156.85 5714.6,4291.85 5714.6,4486.85 5574.6,4626.85 5394.6,4626.85 5359.6,4626.85 5229.6,4496.85 5024.6,4496.85 4884.6,4356.85 4429.6,4356.85
SW on Bottom Layer (solid): 3419.6,4156.85 3249.6,4156.85 3199.6,4106.85 3199.6,3886.85 3244.6,3841.85 3484.6,3841.85 3484.6,3971.85 3689.6,3971.85 3794.6,4076.85 3794.6,4166.85 3759.6,4201.85 3684.6,4201.85 3649.6,4166.85 3649.6,4121.85 3609.6,4081.85 3419.6,4081.85
VIN on Bottom Layer (solid): 1919.6,4631.85 1814.6,4631.85 1674.6,4491.85 1674.6,4281.85 1814.6,4141.85 1924.6,4141.85 2029.6,4141.85 2154.6,4266.85 2314.6,4266.85 2409.6,4171.85 2409.6,3971.85 2489.6,3891.85 3084.6,3891.85 3189.6,3996.85 3189.6,4106.85 3244.6,4161.85 3499.6,4161.85 3499.6,4386.85 2994.6,4386.85 2464.6,4386.85 2354.6,4496.85 2154.6,4496.85 2149.6,4501.85 2024.6,4626.85 2019.6,4631.85 2014.6,4631.85
GND on Bottom Layer (solid): 1514.6,4791.85 1514.6,1621.85 1939.6,1621.85 5864.6,1621.85 5864.6,4791.85
SW on Top Layer (solid): 3419.6,4156.85 3249.6,4156.85 3199.6,4106.85 3199.6,3886.85 3244.6,3841.85 3484.6,3841.85 3484.6,3971.85 3689.6,3971.85 3794.6,4076.85 3794.6,4166.85 3759.6,4201.85 3684.6,4201.85 3649.6,4166.85 3649.6,4121.85 3609.6,4081.85 3419.6,4081.85
GND on Top Layer (solid): 1514.6,4791.85 1514.6,1621.85 1939.6,1621.85 5864.6,1621.85 5864.6,4791.85
CS on Top Layer (solid): 5564.6,4151.85 5339.6,4151.85 5239.6,4251.85 5119.6,4251.85 5059.6,4186.85 5059.6,4086.85 4859.6,3886.85 4804.6,3886.85 4714.6,3791.85 4714.6,3646.85 4854.6,3506.85 5009.6,3506.85 5134.6,3631.85 5504.6,3631.85 5564.6,3631.85 5719.6,3786.85 5719.6,3991.85 5564.6,4151.85
3V3 on Top Layer (solid): 1559.6,2216.85 1559.6,2046.85 1719.6,2046.85 1759.6,2086.85 2229.6,2086.85 2229.6,2171.85 1764.6,2171.85 1719.6,2216.85
VIN on Top Layer (solid): 1969.6,2896.85 1929.6,2896.85 1879.6,2946.85 1879.6,3031.85 1754.6,3031.85 1754.6,2776.85 1939.6,2776.85 1969.6,2806.85
12V on Top Layer (solid): 2164.6,2571.85 1774.6,2571.85 1774.6,2176.85 2024.6,2176.85 2024.6,2256.85 1899.6,2256.85 1899.6,2361.85 1959.6,2421.85 2164.6,2421.85
U4_2 on Top Layer (solid): 2019.6,2896.85 1974.6,2896.85 1974.6,2806.85 1939.6,2771.85 1799.6,2771.85 1799.6,2651.85 2164.6,2651.85 2164.6,2796.85 2034.6,2796.85 2024.6,2806.85 2024.6,2896.85
VOUT on Top Layer (solid): 4429.6,4356.85 4214.6,4356.85 4039.6,4181.85 4044.6,4026.85 4224.6,3896.85 4859.6,3896.85 5054.6,4091.85 5054.6,4191.85 5119.6,4261.85 5239.6,4261.85 5344.6,4156.85 5579.6,4156.85 5714.6,4291.85 5714.6,4486.85 5574.6,4626.85 5394.6,4626.85 5359.6,4626.85 5229.6,4496.85 5024.6,4496.85 4884.6,4356.85 4429.6,4356.85
VIN on Top Layer (solid): 1919.6,4631.85 1814.6,4631.85 1674.6,4491.85 1674.6,4281.85 1814.6,4141.85 1924.6,4141.85 2029.6,4141.85 2154.6,4266.85 2314.6,4266.85 2409.6,4171.85 2409.6,3971.85 2489.6,3891.85 3084.6,3891.85 3189.6,3996.85 3189.6,4106.85 3244.6,4161.85 3499.6,4161.85 3499.6,4386.85 2994.6,4386.85 2464.6,4386.85 2354.6,4496.85 2154.6,4496.85 2149.6,4501.85 2024.6,4626.85 2019.6,4631.85 2014.6,4631.85

## Keep-outs
Keep-Out Layer:
  lines w10: 1524.6,1750.35 ccw(c1642.71,1750.35) 1642.71,1632.24 ; 1524.6,4663.74 cw(c1642.71,4663.74) 1642.71,4781.85 ; 5737.19,1632.24 ccw(c5737.2,1750.35) 5855.31,1750.35 ; 5737.19,4781.85 cw(c5737.2,4663.74) 5855.31,4663.74

## Silkscreen, mask and mechanical layers (free items; w line width, h text height)
Top Overlay:
  text "0-50V" at 3189.6,4577.64 h98.42
  text "0-10A" at 3199.6,4427.64 h98.42
  text "+" at 1604.4,4386.65 h98.42 r135
  text "+" at 5749.4,4386.65 h98.42 r135
  text "VIN" at 1718.81,4043.97 h98.42 r90
  text "OUT" at 5857.97,4012.73 h98.42 r90
  text "-" at 1623.81,3816.85 h98.42 r90
  text "-" at 5763.81,3816.85 h98.42 r90
  text "STM32" at 3779.6,3201.85 h118.11
  text "数控电源开发板" at 3499.6,3081.85 h118.11
  text "BUCK" at 1884.6,1677.64 h98.42
Bottom Overlay:
  text "STM32数控电源开发板" at 4754.6,4586.85 h196.85
  text "20210519" at 3779.6,3116.85 h196.85
  text "3V3" at 5829.6,2926.85 h78.74
  text "CLK" at 5834.6,2866.85 h78.74 r359
  text "DIO" at 5834.6,2806.85 h78.74
  text "GND" at 5844.6,2741.85 h78.74
  text "3V3" at 5824.6,2346.85 h78.74
  text "RXD" at 5829.6,2286.85 h78.74
  text "TXD" at 5829.6,2226.85 h78.74
  text "GND" at 5839.6,2161.85 h78.74
  text "20210518" at 2699.6,1696.85 h196.85

## Text inside footprints (layer, text, board x,y; h text height)
OLED1: Top Overlay "IIC-Connector" at 2724.6,2738.23 h47.24; Top Overlay "0.96'OLED" at 2374.6,2978.23 h47.24